# Altium PCB PCB_C70005-A2.PcbDoc (part 3 of 4)
Units mm, origin at the board's own origin, x right, y up, seen from the top; angles counter-clockwise.
Board outline 80.01 x 50.8 mm, 2 copper layers (Top Layer, Bottom Layer); 96 components, 63 nets, 254 pads, 376 vias.
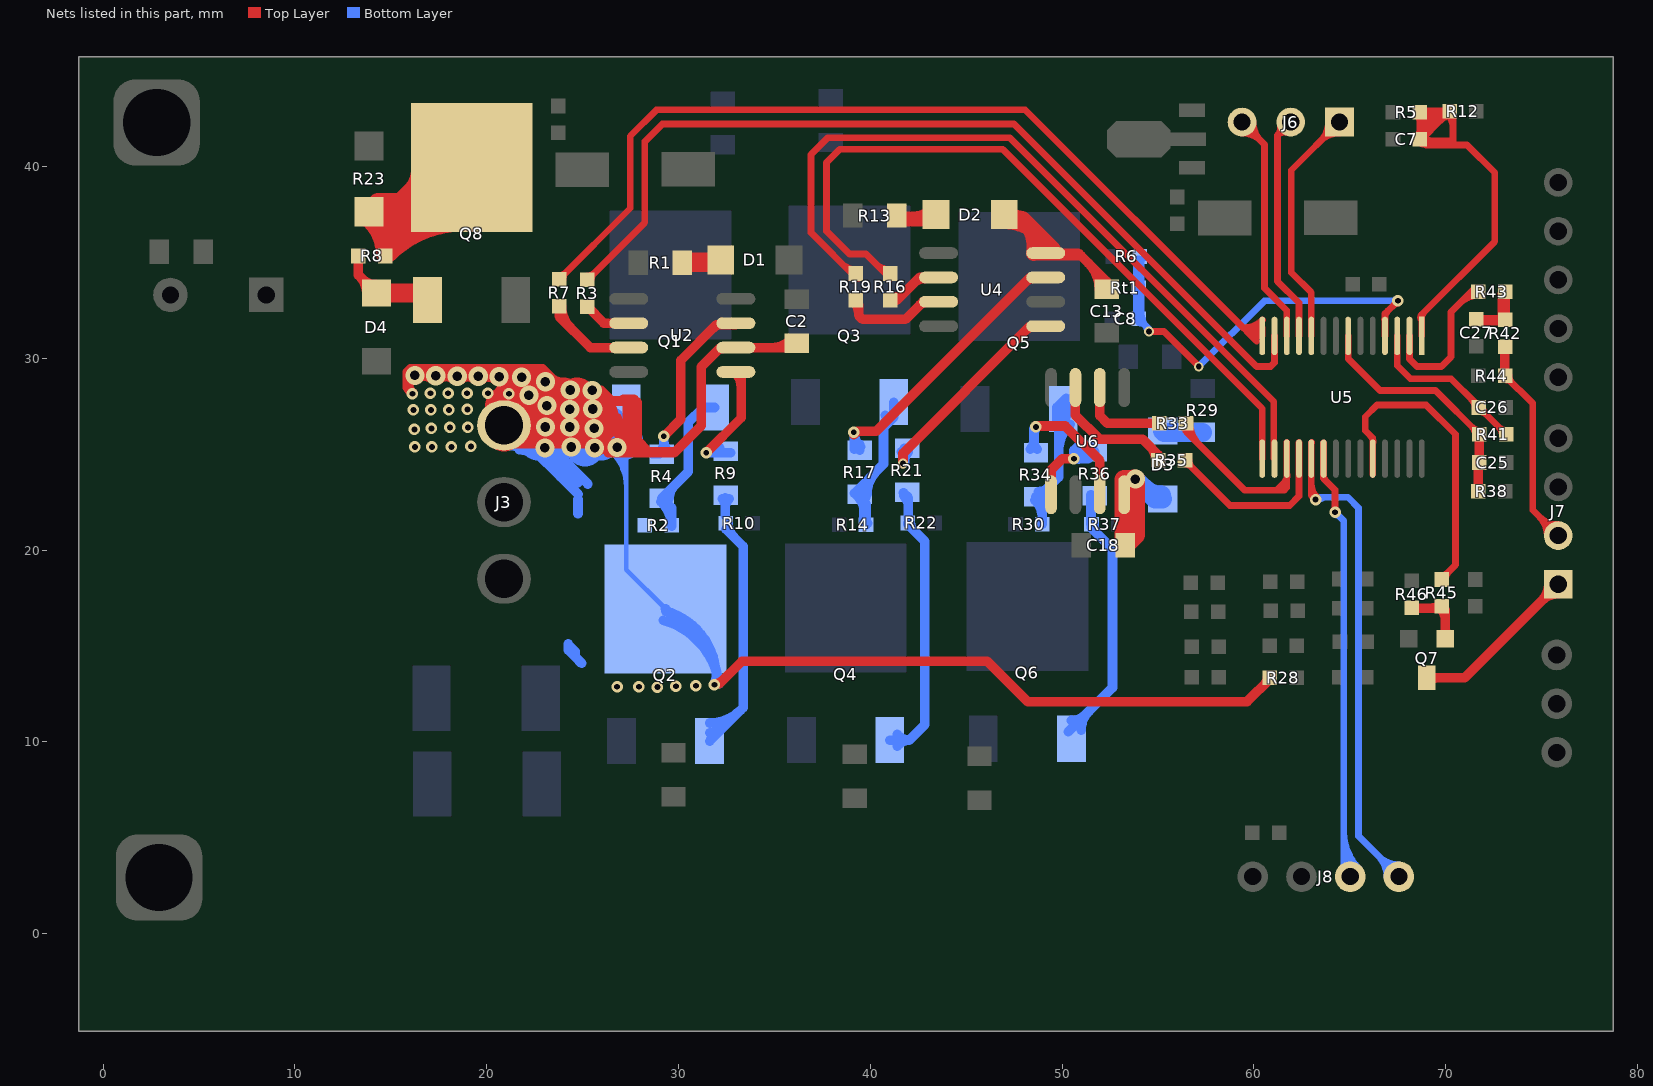
[diagram p3: the nets of this part, all layers, seen from the top]

## Via types
v1: diameter 0.6, hole 0.3, Top Layer to Bottom Layer, 247 vias
v2: diameter 1, hole 0.5, Top Layer to Bottom Layer, 69 vias
v3: diameter 0.5, hole 0.3, Top Layer to Bottom Layer, 60 vias

## Nets (pads, with @x,y where several pads share a name; then routed paths per layer and width w, separated by ;. In a path a pad name is that pad's centre, name@x,y a point inside that pad or via, vN(x,y) a via of type N, cw(c..) or ccw(c..) an arc to the next point about the centre after c; other vN are vias at no path point) (continued)
NetC7_2: C7.2 R5.1 R12.2 U5.1 | length 43.4
  Top Layer w0.35: C7.2@68.511,41.573 ccw(c68.159,41.925) 68.656,41.925 ccw(c69.154,41.925) C7.2@68.802,41.573 ; R5.1@68.511,42.679 cw(c68.159,42.327) 68.656,42.327 cw(c69.154,42.327) R5.1@68.802,42.679 ; C7.2@68.554,41.326 ccw(c69.044,41.816) 69.044,41.123 ; R5.1@68.554,42.723 ccw(c69.014,43.182) R5.1@69.014,42.532 ; R5.1@68.559,42.643 cw(c68.191,41.952) 68.974,41.952 ; C7.2@68.634,41.632 ccw(c68.592,42.012) 68.974,42.012 ; C7.2@68.656,41.3 C7.2@68.656,41.326 ; C7.2@68.656,41.633 ccw(c68.656,42.376) 69.181,41.851 ; R5.1@68.724,42.951 cw(c68.502,42.535) R5.1@68.974,42.535 ; U5.1@68.733,32.016 cw(c69.318,32.016) 68.904,32.43 ; U5.1@68.738,32.001 cw(c68.911,32.131) 68.758,32.283 ; U5.1@68.758,31.166 68.758,32.283 ; R5.1@68.862,42.824 ccw(c69.543,42.824) 69.062,42.343 ; R5.1@68.88,42.532 ccw(c68.88,44.2) 70.06,43.021 cw(c69.77,43.311) 69.77,42.901 ; C7.2@68.986,41.123 71.12,41.123 72.568,39.675 72.568,36.093 68.758,32.283 ; 69.337,42.901 ccw(c69.337,42.143) R5.1@68.802,42.679 ; 69.399,41.326 cw(c69.399,42.17) C7.2@68.802,41.573 ; 69.418,42.342 69.507,42.253 ; 69.647,42.901 cw(c69.647,42.317) R12.2@70.06,42.73 ; 69.725,42.532 ccw(c69.725,43.355) R12.2@70.307,42.773 ; R12.2@69.859,42.532 cw(c69.859,44.027) 68.802,42.97 ccw(c69.154,43.322) 69.154,42.824 ccw(c69.154,42.327) R5.1@68.802,42.679 ; 69.889,41.123 cw(c69.889,42.661) C7.2@68.802,41.573 ; R12.2@70,42.875 cw(c69.502,42.875) 69.854,42.524 cw(c70.206,42.172) R12.2@70.206,42.669 ; R12.2@70.072,42.718 cw(c69.496,42.043) 70.383,42.043 ; 70.383,41.326 C7.2@68.656,41.326 ; 70.383,41.427 70.383,42.062 ; 70.383,42.164 70.383,42.062 ; C7.2@68.656,41.326 R5.1@68.656,42.824 ; C7.2@68.656,41.326 C7.2@68.974,41.643 ; R5.1@68.656,42.824 68.58,42.901 70.18,42.901 R12.2@70.206,42.875 ; R5.1@68.656,42.824 69.571,42.824 R12.2@69.863,42.532 ; C7.2@68.974,41.643 69.507,42.177 ; C7.2@68.974,41.643 68.974,42.012 ; 68.974,42.012 69.151,42.189 69.151,42.253 ; 68.974,42.012 68.974,42.431 ; 68.974,42.431 cw(c69.264,42.721) 68.859,42.79 ccw(c69.264,42.721) 68.974,42.431 ; 68.974,42.431 68.872,42.532 R12.2@69.863,42.532 ; 68.974,42.431 69.151,42.253 ; 69.151,42.253 69.507,42.253 ; 69.507,42.177 69.507,42.253 ; 69.507,42.177 R12.2@69.863,42.532 ; R12.2@69.863,42.532 R12.2@70.206,42.875 ; R12.2@70.206,42.875 70.383,42.697 70.383,42.062
NetC8_2: C8.2 R6.1 Rt1.2 U5.4 | length 26.9
  Top Layer w0.35: v3(54.534,31.394) 55.321,31.394 v3@57.137,29.578 ; U5.4@66.813,32.016 cw(c67.485,32.016) 67.01,32.491 ; U5.4@66.838,31.166 66.838,32.319 ; 66.838,32.334 66.838,32.319 ; v1@67.388,32.995 cw(c67.086,32.995) 67.3,32.781 cw(c67.513,32.568) v1@67.513,32.87 ; v1(67.513,32.995) 66.838,32.319
  Bottom Layer w0.35: C8.2@53.855,32.2 ccw(c53.503,32.552) 54,32.552 ccw(c54.498,32.552) C8.2@54.146,32.2 ; Rt1.2@53.855,33.535 cw(c53.503,33.183) 54,33.183 cw(c54.498,33.183) Rt1.2@54.146,33.535 ; Rt1.2@53.855,33.826 ccw(c53.503,34.178) 54,34.178 ccw(c54.498,34.178) Rt1.2@54.146,33.826 ; C8.2@53.975,31.877 54,31.902 C8.2@54,32.055 54.534,31.521 v3(54.534,31.394) ; C8.2@54,31.849 cw(c54,31.351) 54.352,31.703 cw(c54.704,32.055) C8.2@54.206,32.055 ; 54,32.741 54.051,32.69 ; 54,34.686 cw(c54.671,34.686) R6.1@54.197,35.16 ; C8.2@54.316,31.739 cw(c53.971,31.394) v3@54.459,31.394 ; v3(57.125,29.566) 60.554,32.995 v1(67.513,32.995) ; v1@67.425,32.906 ccw(c67.211,32.693) 67.211,32.995 ccw(c67.211,33.296) v1@67.425,33.083
  Bottom Layer w0.6: C8.2@54,32.055 54,32.741 R6.1@54,35.052
NetC13_1: C13.1 D2.2 U4.8 | length 15.7
  Top Layer w0.5: U4.8@48.532,35.344 50.99,35.344 ; U4.8@49.733,35.484 50.851,35.484 50.99,35.344 ; 51.379,34.955 cw(c50.028,33.604) C13.1@51.939,33.604 ; C13.1@52.324,33.604 52.324,34.011 50.99,35.344
  Top Layer w0.8: D2.2@46.936,37.287 47.93,37.287 ; D2.2@46.987,37.128 cw(c46.987,34.469) 48.868,36.349 ; D2.2@47.217,37.621 ccw(c47.93,38.215) 47.93,37.287 ; U4.8@48.532,35.47 ccw(c46.422,35.779) 47.93,37.287 ; U4.8@49.543,35.674 47.93,37.287
NetC14_2: 
NetC18_1: C18.1 D3.2 U6.8 | length 19.9
  Top Layer w1: U6.8@53.238,22.697 cw(c54.388,22.697) v2(53.823,23.698) ; C18.1@53.284,20.376 ccw(c51.982,21.678) 53.823,21.678 ; U6.8@53.376,22.312 cw(c52.299,21.235) 53.823,21.235 ; U6.8@53.238,23.113 cw(c53.823,23.113) v2(53.823,23.698) ; U6.8@53.238,23.114 v2@53.797,23.673 ; U6.8@53.238,23.114 53.238,23.673 v2@53.797,23.673 ; U6.8@53.238,23.114 U6.8@53.238,22.885 53.238,20.295 C18.1@53.289,20.244 53.823,20.777 v2(53.823,23.698) ; U6.8@53.238,23.401 ccw(c53.238,24.095) v2@53.729,23.605 ; U6.8@53.238,23.401 ccw(c53.238,24.095) v2@53.729,23.605 ; U6.8@53.238,23.401 ccw(c53.238,24.095) v2@53.729,23.605 ; v2@53.797,23.673 v2(53.823,23.698) ; v2(53.823,23.698) ccw(c54.115,22.872) 53.238,22.872 cw(c54.115,22.872) v2(53.823,23.698)
  Bottom Layer w1: v2(53.823,23.698) 54.861,22.66 D3.2@55.245,22.66 ; 54.292,23.229 ccw(c55.183,24.12) D3.2@55.183,22.86
NetC19_2: 
NetC25_2: C25.2 R38.1 R41.2 U5.7 | length 13.4
  Top Layer w0.35: U5.7@64.918,31.166 64.918,29.977 66.573,28.321 69.469,28.321 R41.2@71.755,26.035 ; R41.2@71.549,26.035 ccw(c71.052,26.035) 71.403,26.387 ccw(c71.755,26.738) R41.2@71.755,26.241 ; C25.2@71.704,24.511 C25.2@71.755,24.562
  Top Layer w0.5: R38.1@71.704,23.063 C25.2@71.704,24.511 ; 71.704,24.123 cw(c72.194,24.123) C25.2@71.848,24.469 ; C25.2@71.755,24.562 R41.2@71.755,25.654
NetC26_2: C26.2 R41.1 U5.3 | length 10.7
  Top Layer w0.35: U5.3@67.478,31.166 67.478,29.626 68.174,28.931 70.282,28.931 C26.2@71.501,27.711 ; 71.342,27.87 cw(c70.904,27.432) C26.2@71.524,27.432 ; C26.2@71.465,27.748 ccw(c71.73,28.013) C26.2@71.73,27.638 ; C26.2@71.73,27.226 cw(c71.73,26.667) 72.125,27.062 ; C26.2@71.73,27.432 71.755,27.432 R41.1@73.152,26.035 ; C26.2@71.936,27.432 ccw(c72.372,27.432) C26.2@72.063,27.124 ; R41.1@72.946,26.035 ccw(c72.449,26.035) 72.8,26.387 ccw(c73.152,26.738) R41.1@73.152,26.241
NetC27_2: C27.2 R42.2 R43.1 | length 12.6
  Top Layer w0.35: C27.2@71.399,31.877 C27.2@71.603,31.877 ; C27.2@71.603,32.029 R42.2@72.873,32.029 ; C27.2@71.73,32.004 C27.2@71.603,31.877 ; C27.2@71.748,31.884 cw(c72.1,31.532) 72.1,32.029 cw(c72.1,32.527) 71.748,32.175 ccw(c72.468,32.895) 72.468,31.877 ; 72.297,31.877 ccw(c72.297,32.808) 72.956,32.15 cw(c72.665,32.44) 72.665,32.029 ; 72.543,32.029 cw(c72.543,31.445) R42.2@72.956,31.858 ; 72.873,32.428 cw(c74.15,32.428) R43.1@73.247,33.332 ; 72.873,33.053 ccw(c74.15,33.053) R42.2@73.247,32.15 ; R43.1@72.873,33.35 R42.2@72.873,32.029 ; C27.2@71.603,31.877 72.847,31.877 72.898,31.928 72.873,31.953 R42.2@72.873,32.004 ; R42.2@72.873,32.004 R42.2@73.101,32.004 73.076,32.029 R42.2@72.873,32.029 ; R42.2@72.873,32.004 R42.2@72.873,32.029
  Top Layer w0.5: C27.2@71.73,32.004 R42.2@72.873,32.004 ; R42.2@73.101,32.004 R43.1@73.101,33.477
NetD1_1: D1.1 R1.2 | length 2
  Top Layer w1: R1.2@30.251,35.001 32.08,35.001 D1.1@32.207,35.128
NetD2_1: D2.1 R13.2 | length 3
  Top Layer w0.8: R13.2@41.377,37.262 43.358,37.262 D2.1@43.383,37.287 ; 42.308,37.262 ccw(c42.308,38.555) D2.1@43.222,37.641
NetD3_1: D3.1 R29.2 | length 2.1
  Bottom Layer w1: D3.1@55.245,26.213 55.321,26.137 R29.2@57.328,26.137
NetJ6_1: J6.1 U5.10 | length 14.8
  Top Layer w0.35: U5.10@62.998,31.166 62.998,33.421 61.951,34.468 61.951,39.802 J6.1@64.465,42.316 ; J6.1@63.89,42.316 cw(c62.502,42.316) 63.484,41.335 cw(c64.465,40.353) J6.1@64.465,41.741
NetJ6_2: J6.2 U5.11 | length 13
  Top Layer w0.35: J6.2@61.373,42.155 cw(c60.864,42.006) 61.239,41.631 ; J6.2@61.764,41.765 ccw(c61.614,41.256) 61.239,41.631 ; J6.2@61.925,42.316 61.239,41.631 ; U5.11@62.358,31.166 62.358,32.892 61.239,34.011 61.239,41.631
NetJ6_3: J6.3 U5.12 | length 14.3
  Top Layer w0.35: J6.3@59.385,41.741 cw(c59.385,40.353) 60.367,41.335 cw(c61.348,42.316) J6.3@59.96,42.316 ; J6.3@59.385,42.316 60.554,41.148 60.554,33.655 61.718,32.491 U5.12@61.718,31.166
NetJ7_1: J7.1 Q7.3 | length 11.5
  Top Layer w0.5: Q7.3@69.025,13.335 70.993,13.335 J7.1@75.87,18.212 ; Q7.3@69.171,13.188 cw(c69.525,12.835) 69.525,13.335 cw(c69.525,13.835) Q7.3@69.171,13.482 ; J7.1@75.37,18.212 cw(c74.163,18.212) 75.016,17.358 cw(c75.87,16.505) J7.1@75.87,17.712
NetJ7_2: J7.2 R42.1 R44.2 | length 14
  Top Layer w0.35: R44.2@73.101,28.877 cw(c73.101,28.38) 73.453,28.731 cw(c73.805,29.083) R44.2@73.307,29.083 ; R44.2@73.101,29.083 74.549,27.635 74.549,22.073 J7.2@75.87,20.752 ; J7.2@75.295,20.752 ccw(c73.907,20.752) 74.888,21.733 ccw(c75.87,22.715) J7.2@75.87,21.327
  Top Layer w0.5: R44.2@73.076,29.032 R42.1@73.076,30.582
NetQ1_1: Q1.1 R2.2 R4.1 | length 10
  Bottom Layer w0.5: R4.1@29.085,22.519 cw(c27.884,21.235) R2.2@29.642,21.235 ; R4.1@29.519,22.708 cw(c30.448,22.708) 29.791,23.365 ; R2.2@29.642,21.285 29.642,22.2 R4.1@29.134,22.708 30.505,24.079 30.505,26.645 31.293,27.432 Q1.1@31.877,27.432
NetQ2_1: Q2.1 R9.2 R10.1 | length 17.5
  Bottom Layer w0.5: Q2.1@31.623,10.033 33.376,11.786 33.376,20.191 R10.1@32.473,21.094 ; Q2.1@31.623,10.483 ccw(c31.623,11.569) 32.391,10.801 ; Q2.1@31.623,10.983 ccw(c31.623,13.277) 33.245,11.655 ; R9.2@32.279,22.678 cw(c31.9,22.298) 32.436,22.298 ; 32.436,21.819 R9.2@32.436,22.733 ; 32.436,22.176 cw(c33.145,22.176) R9.2@32.644,22.678 ; R10.1@32.592,21.387 ccw(c33.587,21.387) 32.884,20.684
NetQ3_1: Q3.1 R14.2 R17.1 | length 14.2
  Bottom Layer w0.5: R17.1@39.446,22.911 39.671,22.686 R17.1@39.671,22.458 ; R17.1@39.509,22.661 cw(c39.421,22.316) 39.776,22.316 ; R14.2@39.671,21.565 R17.1@39.671,22.458 ; 39.671,21.882 ccw(c40.348,21.882) R14.2@39.869,21.403 ; 39.671,22.052 ccw(c38.715,22.052) 39.391,22.728 cw(c38.46,21.797) 39.776,21.797 ; R17.1@39.766,22.739 ccw(c39.976,22.551) 39.776,22.352 ; R14.2@39.776,21.311 39.776,22.352 ; R17.1@39.831,22.911 cw(c41.558,22.911) 40.337,24.132 ; Q3.1@40.784,27.024 cw(c40.308,26.766) 40.691,26.383 ; Q3.1@41.224,27.711 41.224,26.916 40.691,26.383 ; R17.1@39.671,22.458 39.776,22.352 ; R17.1@39.671,22.458 39.167,22.962 40.691,24.486 40.691,26.383
NetQ4_1: Q4.1 R21.2 R22.1 | length 17
  Bottom Layer w0.5: Q4.1@41.021,10.084 42.037,10.084 ; Q4.1@41.417,9.779 cw(c42.037,9.302) 42.037,10.084 ; Q4.1@41.417,10.389 ccw(c42.037,10.866) 42.037,10.084 ; R21.2@41.732,22.987 41.986,22.733 R22.1@41.986,21.641 ; R21.2@41.753,22.83 cw(c41.19,22.267) 41.986,22.267 ; R22.1@41.961,21.412 41.961,21.334 42.85,20.445 42.85,10.897 42.037,10.084 ; R22.1@42.092,21.412 ccw(c42.596,21.412) R22.1@42.239,21.056
NetQ5_1: Q5.1 R30.2 R34.1 | length 12.6
  Bottom Layer w0.5: R34.1@48.586,22.601 cw(c47.655,21.67) R30.2@48.971,21.67 ; R34.1@48.641,22.784 48.971,22.454 R30.2@48.971,21.336 ; R34.1@48.768,23.042 ccw(c48.768,23.726) R34.1@49.252,23.242 ; R34.1@48.793,22.784 49.818,23.809 49.818,26.544 50.216,26.941 50.216,27.915 49.737,27.436 Q5.1@49.737,26.463 ; R34.1@49.026,22.784 cw(c49.588,22.784) R34.1@49.19,23.181 ; 49.818,25.107 cw(c51.862,25.107) Q5.1@50.417,26.552
NetQ6_1: Q6.1 R36.2 R37.1 | length 17
  Bottom Layer w0.5: Q6.1@50.317,10.516 52.629,12.827 52.629,20.064 51.537,21.157 R37.1@51.537,21.336 ; Q6.1@50.495,11.11 ccw(c50.495,12.116) 51.206,11.405 ; Q6.1@50.995,10.61 cw(c52.404,10.61) 51.408,11.606 ; R37.1@51.511,21.336 R36.2@51.511,22.887 ; 51.511,22.028 cw(c52.394,22.028) R36.2@51.77,22.652 ; R37.1@51.668,21.336 ccw(c52.417,21.336) 51.887,20.806
NetQ7_1: Q7.1 R45.1 R46.2 | length 5.7
  Top Layer w0.35: R45.1@69.698,16.967 R45.1@69.799,17.069 R45.1@69.99,16.878 ; Q7.1@69.799,15.557 Q7.1@69.99,15.367
  Top Layer w0.5: R46.2@68.224,16.967 R45.1@69.698,16.967 ; 69.238,16.967 ccw(c69.238,17.63) R45.1@69.707,17.161 ; R45.1@69.707,16.976 cw(c69.023,16.293) 69.99,16.293 ; Q7.1@69.843,15.514 ccw(c69.489,15.867) 69.99,15.867 ccw(c70.49,15.867) Q7.1@70.136,15.514 ; Q7.1@69.99,15.367 R45.1@69.99,16.878
NetR3_1: R3.1 U5.13 | length 49.2
  Top Layer w0.35: R3.1@25.248,34.087 28.245,37.084 28.245,41.3 29.159,42.215 47.498,42.215 60.147,29.566 60.875,29.566 61.078,29.769 U5.13@61.078,31.166 ; R3.1@25.248,34.293 ccw(c25.248,34.79) 25.599,34.438 ccw(c25.951,34.087) R3.1@25.454,34.087
NetR3_2: R3.2 U2.2 | length 2.5
  Top Layer w0.5: R3.2@25.248,32.69 26.111,31.826 U2.2@27.407,31.826
NetR4_2: R4.2 U2.7 | length 11.9
  Top Layer w0.5: v1(29.235,25.933) 30.124,26.822 30.124,29.896 31.979,31.75 ; 31.8,31.571 cw(c32.283,31.087) U2.7@32.283,31.771 ; U2.7@32.244,31.864 cw(c31.979,32.115) 31.979,31.75 ; U2.7@32.995,31.75 U2.7@32.333,31.75 ; U2.7@32.995,31.826 32.41,31.826 U2.7@32.333,31.75 ; 31.979,31.75 U2.7@32.333,31.75
  Bottom Layer w0.5: R4.2@28.626,25.019 29.032,25.019 29.235,25.222 v1(29.235,25.933) ; R4.2@29.078,25.176 ccw(c28.699,25.555) 29.235,25.555 ; v1@29.235,25.678 ccw(c29.945,25.678) R4.2@29.443,25.176
NetR7_1: R7.1 U5.14 | length 52.2
  Top Layer w0.35: R7.1@23.774,34.112 27.483,37.821 27.483,41.58 28.854,42.951 48.082,42.951 59.436,31.598 ; R7.1@23.774,34.318 ccw(c23.774,34.816) 24.126,34.464 ccw(c24.478,34.112) R7.1@23.98,34.112 ; 59.489,31.598 ccw(c59.489,32.965) U5.14@60.455,31.998 ; 60.12,31.483 59.55,31.483 ; 60.147,30.886 59.868,31.166 ; 60.235,31.369 59.665,31.369 ; U5.14@60.427,31.598 59.436,31.598 ; U5.14@60.438,31.586 U5.14@60.438,31.166 59.868,31.166 ; 59.436,31.598 59.55,31.483 ; 59.55,31.483 59.665,31.369 ; 59.665,31.369 59.868,31.166
NetR7_2: R7.2 U2.3 | length 6.1
  Top Layer w0.5: R7.2@23.774,32.715 23.774,32.182 25.4,30.556 U2.3@27.407,30.556 ; R7.2@23.905,32.715 ccw(c25.509,32.715) 24.375,31.581
NetR8_1: D4.2 Q8.1 R8.1 | length 10.4
  Top Layer w0.5: R8.1@13.31,35.331 13.31,34.338 D4.2@14.249,33.398 ; 13.375,34.272 cw(c12.501,33.398) D4.2@13.737,33.398 ; 13.525,34.122 ccw(c14.187,34.785) D4.2@14.187,33.848 ; D4.2@14.63,33.08 cw(c15.398,32.312) 15.398,33.398 cw(c15.398,34.484) D4.2@14.63,33.716 ; 15.474,33.398 ccw(c15.474,34.938) Q8.1@16.563,33.849 ; 15.944,33.398 cw(c15.944,32.523) Q8.1@16.563,33.142 ; Q8.1@16.564,33.398 Q8.1@16.916,33.045
  Top Layer w1: D4.2@14.249,33.398 Q8.1@16.564,33.398
NetR9_1: R9.1 U2.5 | length 7.9
  Top Layer w0.5: v1(31.445,25.07) 33.274,26.899 33.274,29.007 U2.5@32.995,29.286 ; U2.5@32.956,29.247 cw(c32.188,28.479) 33.274,28.479
  Bottom Layer w0.5: v1(31.445,25.07) R9.1@32.715,25.07 ; v1@31.527,25.07 ccw(c31.527,25.953) R9.1@32.152,25.328
NetR16_1: R16.1 U5.15 | length 40.6
  Top Layer w0.35: 37.719,37.236 37.719,36.627 ; 40.261,34.948 ccw(c41.046,35.734) R16.1@41.046,34.623 ; R16.1@41.046,34.163 39.776,35.433 38.913,35.433 37.719,36.627 ; U5.15@60.438,24.766 60.438,27.37 46.914,40.894 38.405,40.894 37.719,40.208 37.719,36.627
NetR16_2: R16.2 U4.2 | length 4.8
  Top Layer w0.5: R16.2@41.046,33.151 ccw(c41.046,34.268) 41.836,33.478 ; R16.2@41.313,33.033 41.391,33.033 42.572,34.214 U4.2@44.146,34.214 ; 42.282,33.923 cw(c42.85,33.355) U4.2@42.85,34.159
NetR17_2: R17.2 U4.7 | length 16.3
  Top Layer w0.5: v1@39.141,26.01 39.319,26.187 40.31,26.187 48.336,34.214 U4.7@49.733,34.214 ; 48.171,34.048 cw(c48.438,33.781) U4.7@48.438,34.159
  Bottom Layer w0.5: v1(39.141,26.137) v1@39.167,26.111 ; R17.2@39.167,25.248 v1@39.167,26.111 ; R17.2@39.446,25.197 R17.2@39.446,25.502 ; R17.2@39.491,25.39 cw(c40.133,26.111) v1@39.167,26.111
NetR19_1: R19.1 U5.16 | length 41.4
  Top Layer w0.35: 38.544,34.912 ccw(c39.243,35.611) R19.1@39.243,34.623 ; R19.1@39.395,34.188 39.268,34.188 36.906,36.551 36.906,40.615 37.795,41.504 47.269,41.504 61.042,27.731 U5.16@61.042,24.802
NetR19_2: R19.2 U4.3 | length 6.7
  Top Layer w0.5: R19.2@39.15,32.927 cw(c38.559,32.336) 39.395,32.336 ; R19.2@39.395,32.791 39.395,32.233 39.599,32.029 41.834,32.029 42.748,32.944 U4.3@44.145,32.944 ; 42.583,32.778 cw(c42.85,32.511) U4.3@42.85,32.889
NetR21_1: R21.1 U4.5 | length 14.8
  Top Layer w0.5: v3(41.707,24.511) 41.707,25.044 48.336,31.674 U4.5@49.733,31.674 ; 48.171,31.508 cw(c48.438,31.241) U4.5@48.438,31.619
  Bottom Layer w0.5: R21.1@41.626,25.116 cw(c41.247,24.737) v3@41.783,24.737 ; v3@41.707,24.505 cw(c42.505,24.505) R21.1@41.979,25.104 ; v3(41.707,24.511) 41.707,25.07 41.783,25.298 v3@41.783,24.562 ; v3@41.783,24.614 cw(c42.493,24.614) R21.1@41.991,25.116
NetR33_1: R33.1 U5.17 | length 12.5
  Top Layer w0.35: R33.1@56.32,26.619 ccw(c57.015,26.619) 56.524,26.128 ; R33.1@56.348,26.449 cw(c56.134,26.134) 56.515,26.134 ; R33.1@56.515,26.391 56.515,26.137 59.538,23.114 61.184,23.114 ; R33.1@56.67,26.619 ccw(c58.21,26.619) 57.121,25.53 ; 61.571,23.5 ccw(c61.155,23.916) U5.17@61.743,23.916 ; U5.17@61.722,25.603 61.718,25.599 U5.17@61.718,24.766 61.718,23.647 ; 61.184,23.114 61.718,23.647 ; 61.184,23.114 61.57,23.114 61.718,23.262 61.718,23.647
NetR33_2: R33.2 U6.2 | length 4.7
  Top Layer w0.5: U6.2@51.968,28.473 51.968,27 52.349,26.619 R33.2@55.067,26.619
NetR34_2: R34.2 U6.7 | length 8.2
  Top Layer w0.5: v1@48.641,26.467 50.165,26.467 51.968,24.663 U6.7@51.968,22.885
  Bottom Layer w0.5: R34.2@48.332,25.252 ccw(c47.83,25.754) 48.539,25.754 ; R34.2@48.539,25.451 48.539,26.314 v1(48.641,26.416) ; 48.539,25.631 ccw(c49.076,25.631) R34.2@48.696,25.252 ; 48.539,26.05 cw(c49.007,26.05) v1@48.676,26.381
NetR35_1: R35.1 U5.18 | length 10.7
  Top Layer w0.35: R35.1@56.413,24.483 cw(c56.413,24.047) R35.1@56.722,24.355 ; R35.1@56.413,24.663 58.75,22.327 61.874,22.327 62.358,22.81 U5.18@62.358,24.766 U5.18@62.358,25.602 ; R35.1@56.619,24.689 ccw(c57.178,24.689) 56.783,24.294
NetR35_2: R35.2 U6.3 | length 7.4
  Top Layer w0.5: U6.3@50.698,28.473 50.698,27.026 51.943,25.781 54.204,25.781 R35.2@55.016,24.968 ; 54.595,25.389 cw(c53.895,24.689) R35.2@54.885,24.689
NetR36_1: R36.1 U6.5 | length 10.8
  Top Layer w0.5: U6.5@49.428,22.885 49.428,24.181 50.013,24.765 v1(50.622,24.765)
  Bottom Layer w0.5: v1@50.589,24.802 ccw(c50.001,25.451) 50.876,25.451 ; v1@50.671,24.775 cw(c51.406,24.921) 50.876,25.451 ; v1@50.876,24.74 v1@50.876,24.765 ; R36.1@51.334,25.072 ccw(c50.876,24.985) 50.876,25.451 ; R36.1@51.354,25.23 cw(c50.622,25.573) v1(50.622,24.765) ; v1(50.622,24.765) 50.622,25.197 50.876,25.451 ; v1(50.622,24.765) v1@50.876,24.765 ; v1@50.876,24.765 ccw(c50.876,25.226) 51.332,25.158 cw(c50.876,25.226) v1@50.876,24.765 ; v1@50.876,24.765 50.876,25.451 ; v1@50.876,24.765 51.359,24.765 R36.1@51.714,25.121 51.384,25.451 50.876,25.451
NetR43_2: R43.2 U5.2 | length 8.9
  Top Layer w0.35: U5.2@68.118,31.166 68.118,29.957 68.504,29.571 69.779,29.571 70.282,30.074 70.282,32.41 R43.2@71.526,33.655 ; 70.745,32.874 cw(c71.704,31.915) R43.2@71.704,33.271
NetR45_2: R45.2 U5.24 | length 17.8
  Top Layer w0.35: 66.084,25.95 cw(c65.749,25.616) U5.24@66.223,25.616 ; U5.24@66.203,23.952 66.198,23.958 U5.24@66.198,24.766 66.198,25.837 65.811,26.223 65.811,26.949 66.421,27.559 68.986,27.559 70.51,26.035 70.51,19.228 69.774,18.491 R45.2@69.799,18.466 ; R45.2@69.799,18.672 ccw(c69.799,19.046) R45.2@70.064,18.782 ; R45.2@70.005,18.466 cw(c70.625,18.466) 70.187,18.904
R23-2: Q8.2 R8.2 R23.2 | length 50.2
  Top Layer w1: R23.2@13.713,37.432 cw(c12.27,35.468) R8.2@14.707,35.468 ; R23.2@13.849,37.382 cw(c13.78,36.457) 14.707,36.457 ; R23.2@13.988,37.876 ccw(c14.585,39.034) 15.507,38.113 ; R23.2@14.064,37.468 cw(c15.507,36.175) 15.507,38.113 ; R23.2@14.078,37.801 ccw(c16.075,39.307) Q8.2@16.075,36.805 ; Q8.2@16.111,38.717 ccw(c15.074,39.755) Q8.2@16.541,39.755 ; Q8.2@16.436,37.061 cw(c18.918,34.579) Q8.2@19.12,38.083 ; Q8.2@16.509,37.134 ccw(c14.014,39.629) Q8.2@17.542,39.715 ; Q8.2@16.542,39.691 cw(c10.792,39.551) R8.2@14.859,35.484 ; Q8.2@19.062,37.085 ccw(c18.746,31.597) R8.2@14.859,35.484 ; R23.2@13.868,37.643 14.707,36.805 ; R23.2@13.868,37.643 15.037,37.643 ; R23.2@13.868,37.643 14.338,38.113 15.507,38.113 ; 14.707,36.805 Q8.2@16.076,36.805 ; 14.707,36.805 14.707,35.636 R8.2@14.859,35.484 ; R8.2@14.859,35.484 19.216,39.841 Q8.2@19.216,39.945 ; 15.037,37.643 Q8.2@16.914,37.643 ; 15.037,37.643 15.507,38.113 ; 15.507,38.113 17.339,39.945 Q8.2@19.216,39.945 ; Q8.2@16.076,36.805 Q8.2@16.914,37.643 ; Q8.2@16.914,37.643 Q8.2@19.216,39.945
SCL: J8.2 U5.20 | length 27.9
  Top Layer w0.35: U5.20@63.613,23.916 ccw(c63.984,23.916) 63.722,23.653 ; U5.20@63.627,25.578 63.638,25.567 U5.20@63.638,24.766 63.638,23.737 64.237,23.138 v1(64.237,21.971) ; v1@64.148,22.059 ccw(c63.935,22.273) 64.237,22.273 ccw(c64.538,22.273) v1@64.325,22.059
  Bottom Layer w0.35: v1@64.237,21.846 cw(c64.237,21.544) 64.45,21.758 cw(c64.663,21.971) v1@64.362,21.971 ; v1(64.237,21.971) 64.694,21.514 64.694,3.302 J8.2@65.024,2.972 ; 64.694,4.433 ccw(c66.485,4.433) J8.2@65.218,3.166 ; 64.694,5.278 ccw(c67.33,5.278) J8.2@65.466,3.414
SDA: J8.1 U5.19 | length 29.9
  Top Layer w0.35: 62.998,23.471 ccw(c64.06,23.471) v1@63.309,22.72 ; U5.19@63.017,25.603 62.998,25.584 U5.19@62.998,24.766 62.998,22.854 v1@63.195,22.657 ; v1@63.096,22.631 ccw(c62.794,22.631) 63.007,22.845 ccw(c63.221,23.058) v1@63.221,22.756
  Bottom Layer w0.35: v1(63.221,22.631) 63.348,22.758 64.897,22.758 65.456,22.2 65.456,5.08 J8.1@67.564,2.972 ; v1@63.309,22.543 cw(c63.829,22.023) 63.829,22.758 ; J8.1@66.939,2.972 ccw(c65.43,2.972) 66.497,4.039 ccw(c67.564,5.106) J8.1@67.564,3.597
U: C2.2 J3.1 Q1.3 Q2.2 R2.1 R28.1 U2.6 | length 332.5
  Top Layer w0.5: v2@25.796,25.138 cw(c26.109,24.789) v2@26.441,25.121 ; v2@25.853,26.34 ccw(c27.377,26.34) 26.299,25.263 ; v2@25.853,26.346 ccw(c26.856,26.372) v2@26.354,25.504 ; 26.296,25.266 ccw(c26.72,25.691) v2@26.852,25.105 ; v2@26.633,25.538 cw(c27.14,24.953) 27.687,25.5 ; v2@26.636,25.541 cw(c27.013,25.092) 27.427,25.506 ; 26.695,26.492 27.292,25.895 28.067,25.121 ; 26.721,26.213 27.813,25.121 ; v2@26.742,25.593 cw(c26.484,26.738) 25.654,25.908 v2@26.441,25.121 ; 26.797,26.899 26.797,26.772 27.337,26.232 27.838,25.73 ; v2@26.958,25.158 cw(c27.365,24.673) 27.813,25.121 ; v2@26.961,25.16 cw(c27.493,24.546) 28.067,25.121 ; v2@26.99,25.508 ccw(c27.813,26.188) 27.813,25.121 ; 27.127,27.857 27.337,27.857 27.693,27.857 27.838,27.711 27.838,25.73 ; v1@31.877,13.029 ccw(c31.877,13.641) 32.309,13.208 ; 32.016,30.391 cw(c32.283,30.124) U2.6@32.283,30.501 ; v1@32.131,13.03 33.299,14.199 ; 34.868,30.556 ccw(c34.868,31.96) C2.2@35.86,30.967 ; C2.2@35.636,30.556 U2.6@32.995,30.556 32.182,30.556 31.191,29.566 31.191,26.492 29.82,25.121 28.448,25.121 ; v2@26.441,25.121 27.813,25.121 ; 27.813,25.121 28.067,25.121 ; 27.838,25.73 28.448,25.121 ; 28.067,25.121 28.448,25.121
  Top Layer w0.508: 15.875,28.473 cw(c16.264,28.473) v2@16.259,28.862 ; v1@16.147,28.185 cw(c16.327,28.6) 15.875,28.6 v2@15.875,28.804 ; v1@16.159,28.178 cw(c16.706,28.804) v2@15.875,28.804 ; v2@16.43,28.934 cw(c17.647,27.717) v2@17.647,29.439 ; v2@16.43,29.282 ccw(c16.973,29.825) v2@16.973,29.058 ; v2@16.693,29.058 ccw(c16.693,29.738) v2@17.174,29.257 ; 16.816,29.058 cw(c16.816,28.55) v2@17.174,28.909 ; 16.952,29.439 cw(c16.952,27.544) 18.292,28.884 ccw(c17.872,28.464) 17.872,29.058 ccw(c17.872,29.651) v2@18.292,29.232 ; v2@17.163,28.922 ccw(c16.027,27.934) v2@16.027,29.439 ; v2@17.522,29.257 ccw(c18.003,29.738) v2@18.003,29.058 ; 17.881,29.058 ccw(c17.881,28.55) 17.522,28.909 cw(c18.801,27.631) 18.801,29.439 ; 18.044,29.439 cw(c18.044,27.544) 19.384,28.884 ccw(c18.964,28.464) 18.964,29.058 ccw(c18.964,29.651) v2@19.384,29.232 ; v2@18.64,29.232 ccw(c19.06,29.651) 19.06,29.058 ccw(c19.06,28.464) 18.64,28.884 cw(c19.98,27.544) 19.98,29.439 ; v2@18.66,28.907 cw(c18.95,28.681) 19.045,29.036 ; v2@18.66,29.209 ccw(c18.95,29.434) 19.045,29.079 ; 19.075,29.439 cw(c19.075,27.457) 20.476,28.858 ccw(c19.995,28.377) v2@19.995,29.058 ; v2@19.732,29.232 ccw(c20.152,29.651) 20.152,29.058 ccw(c20.152,28.464) 19.732,28.884 cw(c21.072,27.544) 21.072,29.439 ; v2@19.743,28.895 cw(c20.043,28.631) 20.146,29.017 ; 20.118,29.058 ccw(c20.118,29.565) v2@20.476,29.206 ; 20.182,29.439 cw(c20.182,27.37) 21.645,28.833 ccw(c21.102,28.29) v2@21.102,29.058 ; 20.302,29.439 cw(c20.302,28.684) v2@20.835,29.217 ; v2@20.465,29.217 cw(c20.999,28.684) 20.999,29.439 ; v2@20.824,29.206 ccw(c21.183,29.565) 21.183,29.058 ; v2@20.845,28.882 cw(c21.149,28.647) 21.249,29.018 ; v2@20.875,29.439 cw(c20.875,26.59) 22.889,28.604 ccw(c21.795,27.51) v2@21.795,29.058 ; 21.305,29.058 ccw(c21.305,28.377) 20.824,28.858 cw(c22.225,27.457) 22.225,29.439 ; 21.409,29.439 cw(c21.409,28.597) v2@22.004,29.192 ; v2@21.584,29.123 cw(c22.092,28.871) 22.092,29.439 ; v2@21.993,28.833 cw(c22.535,28.29) 22.535,29.058 ; v2@22.039,28.898 cw(c22.911,28.466) 22.911,29.439 ; 22.101,29.439 cw(c22.101,27.816) v2@23.248,28.963 ; v2@23.121,28.539 cw(c23.361,27.552) v2@24.079,28.27 ; v2@23.259,28.629 cw(c23.599,28.371) 23.812,28.741 ; v2@23.332,29.018 ccw(c24.359,30.045) v2@24.359,28.592 ; v2@24.079,27.459 cw(c24.845,27.459) v2@24.477,28.131 ; v2@24.079,27.504 v2@24.079,28.27 ; v2@24.409,28.321 25.959,28.321 26.515,27.765 ; v2@24.471,27.534 cw(c24.966,28.27) v2@24.079,28.27 ; v2@24.533,28.172 cw(c24.891,27.814) 24.891,28.321 ; v2@24.533,28.52 ccw(c25.014,29.002) v2@25.014,28.321 ; v2@25.328,28.147 ccw(c24.908,27.727) 24.908,28.321 ccw(c24.908,28.915) v2@25.328,28.495 ; v2@25.541,28.078 cw(c25.723,26.973) 26.515,27.765 ; 26.34,25.07 29.769,25.07 29.82,25.121 ; v2@26.971,25.523 ccw(c28.065,26.618) 28.065,25.07 ; 27.127,27.765 26.515,27.765 ; 27.292,25.895 27.337,25.94 27.337,26.232 27.337,27.857 ; 33.299,14.199 46.101,14.199 48.209,12.09 59.639,12.09 R28.1@60.858,13.31 ; R28.1@60.58,13.031 ccw(c60.277,13.335) R28.1@60.706,13.335 ; v2@15.875,28.804 16.129,29.058 v2@23.292,29.058 ; v2@15.875,28.804 15.875,29.286 v2@16.027,29.439 ; v2@16.027,29.439 22.911,29.439 ; 22.911,29.439 v2@23.292,29.058 ; v2@23.292,29.058 v2@24.079,28.27 ; v2@26.797,25.595 ccw(c26.797,26.066) 27.13,25.733 cw(c26.797,26.066) v2@26.797,25.595 ; v2@27.043,25.349 cw(c27.76,25.349) 27.253,25.856 ccw(c27.76,25.349) v2@27.043,25.349
  Top Layer w2: J3.1@20.9,26.137 cw(c24.13,26.137) 21.846,28.421 ; J3.1@20.9,26.651 cw(c23.054,26.651) 21.941,28.495 ; J3.1@21.215,26.291 cw(c24.079,23.517) v2@24.079,27.504 ; J3.1@21.342,26.289 ccw(c21.342,29.331) 23.493,27.18 cw(c21.851,28.822) J3.1@21.851,26.5 ; J3.1@21.644,27.504 cw(c21.644,24.996) 23.417,26.77 ; 21.846,27.713 ccw(c22.352,28.219) 22.352,27.504 ; 22.048,27.504 ccw(c22.048,28.219) 22.553,27.713 ; 22.581,28.646 ccw(c24.079,29.058) v2@24.079,27.504 ; 22.71,26.77 cw(c24.483,24.996) v2@24.483,27.504 ; v2@22.914,27.504 cw(c22.914,24.996) 24.687,26.77 ; v2@23.026,26.289 ccw(c23.026,28.637) 24.687,26.977 cw(c23.536,28.128) v2@23.536,26.5 ; v2@23.532,27.504 ccw(c23.532,29.173) 24.712,27.993 ; 23.869,26.601 cw(c25.201,26.07) 25.201,27.504 v2@24.079,27.504 ; 23.93,27.035 ccw(c25.4,28.111) v2@25.4,26.289 ; 23.98,26.977 ccw(c25.131,28.128) v2@25.131,26.5 ; 24.005,27.993 ccw(c25.185,29.173) v2@25.185,27.504 ; v2@24.159,26.289 ccw(c24.159,28.724) 25.881,27.002 cw(c24.668,28.215) v2@24.668,26.5 ; v2@24.428,26.5 cw(c24.428,28.822) 22.786,27.18 ccw(c24.937,29.331) 24.937,26.289 ; 25.034,27.441 ccw(c26.329,27.218) v2@25.4,26.289 ; 25.969,26.68 ccw(c24.079,24.924) v2@24.079,27.504 ; J3.1@20.9,26.5 21.111,26.289 v2@25.4,26.289 ; J3.1@20.9,26.5 20.9,27.504 v2@24.079,27.504 ; J3.1@20.9,26.5 25.189,26.5 v2@25.4,26.289 ; v2@24.079,27.504 ccw(c24.079,25.832) 22.63,26.665 cw(c24.079,25.832) v2@24.079,27.504 ; v2@24.333,26.916 cw(c24.333,25.854) 25.084,26.605 ccw(c24.333,25.854) v2@24.333,26.916
  Bottom Layer w0.254: v2@26.533,25.085 cw(c24.738,23.29) 27.277,23.29 ; v2@26.533,25.613 ccw(c24.738,27.409) Q1.3@27.277,27.409 ; v2@26.713,25.265 cw(c25.351,23.903) 27.277,23.903 ; v2@26.713,25.433 ccw(c25.351,26.795) Q1.3@27.277,26.795 ; Q1.3@26.836,26.541 cw(c25.773,25.478) 27.277,25.478 cw(c28.781,25.478) Q1.3@27.718,26.541 ; v2@26.857,25.228 ccw(c26.414,26.126) 27.381,25.867 ; v2@26.892,25.254 ccw(c25.964,26.182) 27.277,26.182 ; v2@26.892,25.445 cw(c25.964,24.516) 27.277,24.516 ; Q1.3@27.016,26.721 cw(c26.386,26.091) 27.277,26.091 cw(c28.168,26.091) Q1.3@27.538,26.721 ; v2@27.072,25.074 ccw(c26.577,25.569) 27.277,25.569 ; v2@27.072,25.624 cw(c26.577,25.13) 27.277,25.13 ; 27.252,24.895 ccw(c27.191,24.956) 27.277,24.956 ; 27.252,25.804 cw(c27.191,25.743) 27.277,25.743 ; Q1.3@27.277,27.432 27.277,18.979 Q2.2@29.323,16.933
  Bottom Layer w0.5: Q2.2@29.209,16.334 cw(c28.126,12.449) 32.055,13.359 ; Q2.2@29.323,16.933 31.801,14.455 v1@32.131,13.03 ; Q2.2@29.343,16.815 cw(c28.384,13.374) Q2.2@31.865,14.18 ; v1@31.835,13.006 ccw(c30.982,13.538) Q2.2@31.961,13.764
  Bottom Layer w0.508: J3.1@20.9,26.5 21.176,26.5 23.838,23.838 ; J3.1@21,26.47 cw(c21,23.459) v2@23.129,25.588 ; J3.1@21.447,26.229 ccw(c23.038,27.819) v2@23.038,25.57 ; 21.704,25.246 ccw(c22.069,26.363) v2@22.87,25.504 ; 21.786,25.304 ccw(c22.073,26.761) v2@22.901,25.528 ; J3.1@21.834,26.235 ccw(c22.118,27.13) v2@22.867,26.564 ; J3.1@21.979,26.197 ccw(c23.065,26.824) v2@23.042,25.57 ; J3.1@22.046,26.5 ccw(c24.147,26.5) v2@22.661,25.014 ; J3.1@22.087,26.19 cw(c21.321,24.864) v2@22.8,25.26 ; 22.219,25.457 ccw(c21,24.239) 21,25.962 cw(c21,21.725) 23.996,24.721 ; 22.241,25.644 cw(c21.997,24.716) v2@22.825,25.2 ; 22.314,25.361 ccw(c23.038,26.085) v2@23.038,25.062 ; 22.428,25.418 ccw(c23.046,25.775) v2@23.033,25.062 ; 22.479,26.5 22.479,26.238 ; 22.519,26.018 ccw(c22.726,26.671) v2@23.272,26.258 ; 22.523,24.979 ccw(c22.74,25.643) v2@23.216,25.132 ; v2@22.793,25.35 ccw(c21.706,25.465) 22.479,26.238 ; v2@22.802,25.394 cw(c22.504,25.482) 22.504,25.171 ; v2@22.801,26.416 ccw(c24.008,26.416) v2@23.155,25.562 ; v2@22.82,25.439 cw(c22.377,25.672) 22.377,25.171 22.504,25.171 ; v2@22.854,25.487 ccw(c22.53,25.776) v2@22.906,25.993 ; v2@22.936,25.349 24.765,23.52 ; v2@23.029,25.586 cw(c23.054,24.851) 23.675,25.244 ; v2@23.038,25.078 cw(c23.038,23.625) 24.065,24.652 ; v2@23.046,25.078 cw(c23.09,23.827) 24.148,24.496 ; v2@23.072,25.08 cw(c23.2,24.169) 23.754,24.904 ; 23.086,24.59 ccw(c21,22.504) 21,25.454 cw(c21,19.99) 24.864,23.854 ; v2@23.278,25.375 ccw(c24.592,25.657) 23.862,24.529 ; v2@23.284,25.324 ccw(c24.062,25.324) 23.512,24.774 ; v2@23.309,26.416 ccw(c25.743,26.416) 24.022,24.695 ; 24.257,15.113 24.257,15.054 ; 24.765,21.895 24.765,22.635 ; 24.765,22.911 23.838,23.838 ; 24.952,14.097 24.599,14.45 ; 25.273,23.444 22.479,26.238 ; 22.504,25.171 23.838,23.838 ; 23.838,23.838 cw(c25.186,25.186) 23.283,25.308 ccw(c25.186,25.186) 23.838,23.838 ; 24.257,15.054 24.257,14.792 24.599,14.45 ; 24.257,15.054 24.599,14.712 24.599,14.45 ; v2@22.776,25.341 ccw(c23.693,25.282) 23.043,24.632 cw(c23.693,25.282) v2@22.776,25.341
  Bottom Layer w2: J3.1@20.9,26.5 22.479,26.5 ; J3.1@21.405,26.5 cw(c21.405,23.691) 23.391,25.677 ; J3.1@21.851,26.5 ccw(c21.851,28.822) 23.493,27.18 ; 22.684,25.677 cw(c24.67,23.691) v2@24.67,26.5 ; 22.786,27.18 ccw(c24.428,28.822) v2@24.428,26.5 ; v2@22.9,26.5 cw(c22.9,23.865) 24.763,25.728 ; v2@23.536,26.5 ccw(c23.536,28.128) 24.687,26.977 ; 23.98,26.977 ccw(c25.131,28.128) v2@25.131,26.5 ; v2@23.996,26.5 cw(c23.996,23.691) 25.982,25.677 ; 24.056,25.728 cw(c25.919,23.865) v2@25.919,26.5 ; v2@24.668,26.5 ccw(c24.668,28.215) 25.881,27.002 ; 25.129,25.353 cw(c26.345,25.282) 26.345,26.5 ; 25.161,27.015 ccw(c26.345,28.118) 26.345,26.5 ; v2@25.226,26.5 cw(c25.226,23.778) 27.151,25.703 ; 22.479,26.5 ccw(c22.479,27.675) 23.628,27.429 cw(c22.479,27.675) 22.479,26.5 ; 22.479,26.5 26.345,26.5
  other v1: 28.905,12.852 26.797,12.878 27.94,12.878 29.87,12.903 30.912,12.929 31.877,12.979 16.256,25.375 17.145,25.375 18.161,25.375 19.177,25.4 16.231,26.289 17.12,26.34 18.085,26.391 19.025,26.391 16.18,27.305 17.094,27.305 18.034,27.305 18.999,27.33 16.129,28.143 21.158,28.143 17.069,28.169 17.983,28.169 18.974,28.169 20.066,28.169
  other v2: 23.038,25.324 25.629,25.324 26.797,25.349 24.409,25.375 25.603,26.34 23.063,26.416 24.333,26.416 24.333,27.33 25.527,27.356 23.139,27.534 22.2,28.067 25.502,28.321 24.359,28.346 23.063,28.778 21.819,29.007 20.65,29.032 18.466,29.058 19.558,29.058 17.348,29.083 16.256,29.108